# Altium PCB SD_Board.PcbDoc
Units mm, origin at the board's own origin, x right, y up, seen from the top; angles counter-clockwise.
Board outline 37.85 x 50.93 mm, 2 copper layers (Top Layer, Bottom Layer); 52 components, 41 nets, 216 pads, 226 vias.
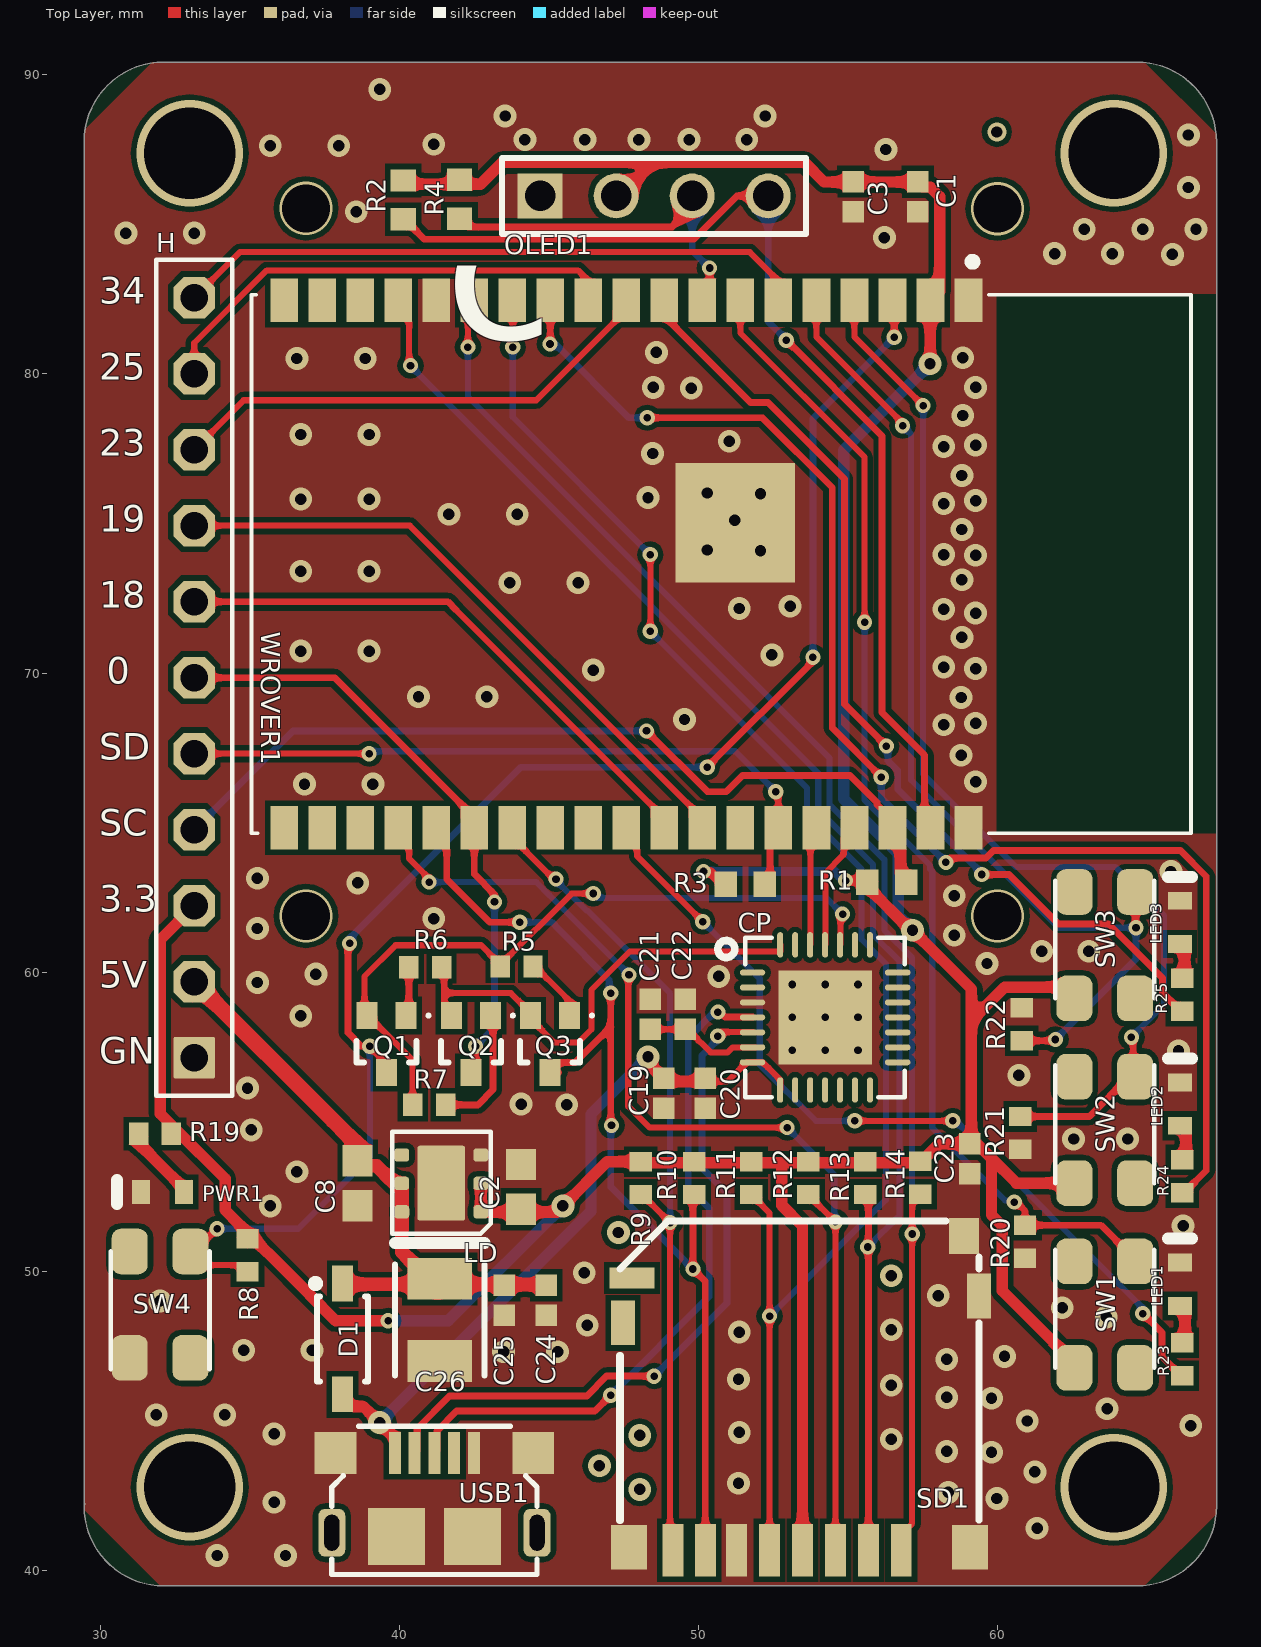
[diagram p0: Top Layer view]
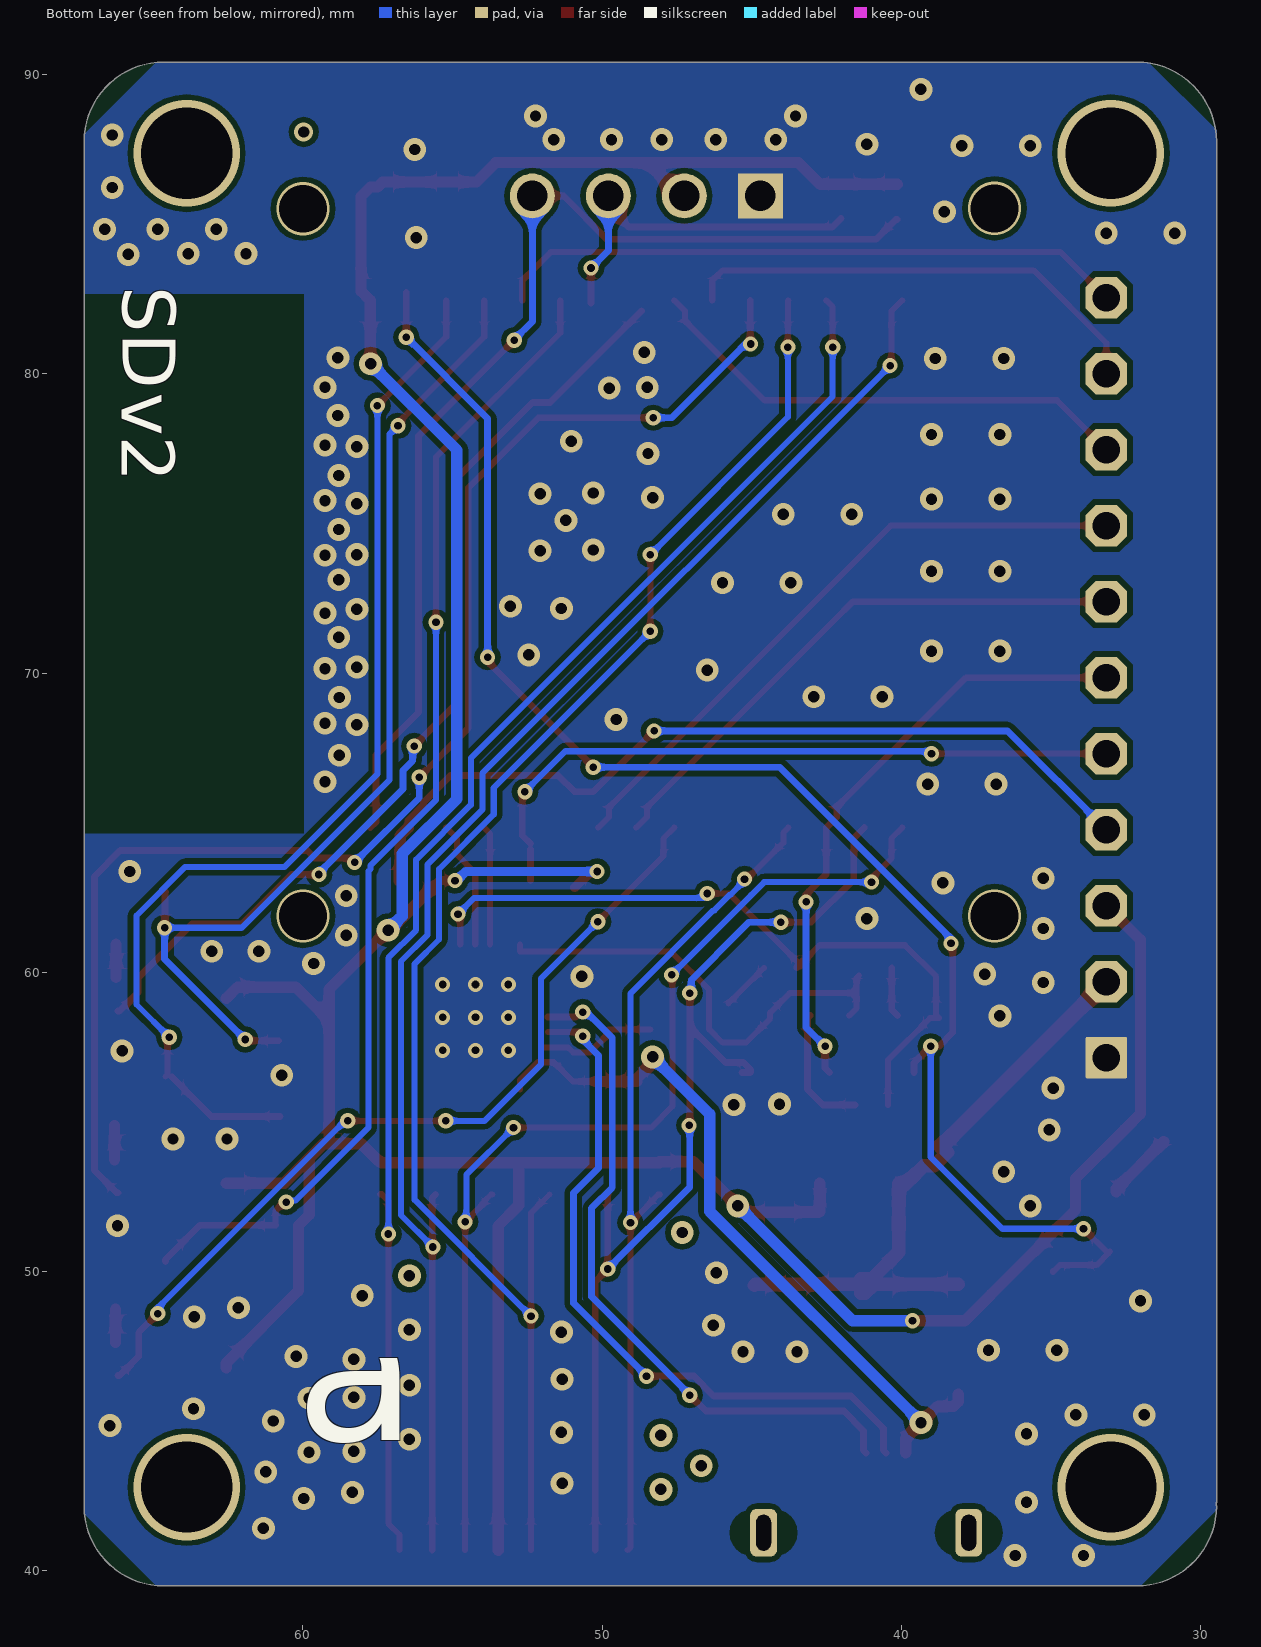
[diagram p1: Bottom Layer view, seen from below]

## Layer stack, top to bottom
Top Solder: solder mask 0.0102, Solder Resist, Dk 3.5
Top Layer: signal copper 0.0356
Dielectric 1: dielectric 0.32, FR-4, Dk 4.8
Bottom Layer: signal copper 0.0356
Bottom Solder: solder mask 0.0102, Solder Resist, Dk 3.5

## Board outline
29.464,42.164 cw(c29.591,42.164) 29.481,42.227 cw(c29.591,42.291) 29.464,42.291 29.464,87.757 cw(c29.591,87.757) 29.464,87.758 cw(c32.131,87.757) 32.131,90.424 cw(c32.131,90.297) 32.132,90.424 64.643,90.424 cw(c64.643,87.757) 67.31,87.757 67.31,87.376 cw(c67.183,87.376) 67.31,87.375 67.31,42.164 cw(c64.643,42.164) 64.643,39.497 32.132,39.497 32.131,39.497 cw(c32.131,42.164)

## Design rules (kind name [scope] priority, off if disabled: settings)
Clearance [All] p1: gap=0.178 ignorepadtopadclearanceinfootprint=FALSE
ComponentClearance [InComponent('No Component')] p1: gap=0 collisioncheckmode=3 verticalgap=2540 showdistances=FALSE
HoleSize [All] p1: absolutevalues=TRUE maxlimit=7.62 minlimit=0.025 maxpercent=80.000 minpercent=20.000
MinimumSolderMaskSliver [All] p1: minsoldermaskwidth=0
PolygonConnect PolygonConnect_2 [All vs IsNamedPolygon('BOT_GND')] p1: connectstyle=Direct reliefconductorwidth=0.254 reliefentries=4 polygonreliefangle="90 Angle" airgapwidth=0.254
PolygonConnect PolygonConnect_1 [All vs IsNamedPolygon('TOP_GND')] p2: connectstyle=Direct reliefconductorwidth=0.254 reliefentries=4 polygonreliefangle="90 Angle" airgapwidth=0.254
PolygonConnect [All] p3: connectstyle=Relief reliefconductorwidth=0.254 reliefentries=4 polygonreliefangle="90 Angle" airgapwidth=0.254
RoutingVias [All] p1: holewidth=0.254 width=0.508 viastyle="Through Hole" minholewidth=0.254 minwidth=0.508 maxholewidth=7.62 maxwidth=7.62
SilkToSilkClearance [All] p1: silktosilkclearance=0
SilkToSolderMaskClearance [IsPad] p1: minsilkscreentomaskgap=0 clearancetoexposedcopper=TRUE
SolderMaskExpansion [All] p1: expansion=0.102 istentingtop=FALSE
Width [All] p1: maxlimit=5.08 minlimit=0.178 preferedwidth=0.229
25 further rules are at their usual default settings.

## Components (designator, comment, footprint, x,y, rotation, side; value= is the part's Value field where it differs from the comment)
C1 "10uF" CAPC0402(1005)60_M 57.328,85.918 r270 top value=6.9pF
C2 "10uF" CAPC1608X90X35NL15T15 44.069,52.832 r270 top
C3 "1uF" CAPC0402(1005)60_M 55.169,85.926 r270 top value=6.9pF
C8 "10uF" CAPC1608X90X35NL15T15 38.608,52.959 r270 top
C19 "10uF" CAPC0402(1005)60_M 48.832,55.958 r270 top value=6.9pF
C20 "0.1uF" CAPC0402(1005)60_M 50.229,55.958 r270 top value=6.9pF
C21 "1uF" CAPC0402(1005)60_M 48.387,58.598 r270 top value=6.9pF
C22 "0.1uF" CAPC0402(1005)60_M 49.555,58.598 r270 top value=6.9pF
C23 "0.1uF" CAPC0402(1005)60_M 59.063,53.772 r270 top value=6.9pF
C24 "1uF" CAPC0402(1005)60_M 44.907,49.047 r270 top value=6.9pF
C25 "10uF" CAPC0402(1005)60_M 43.51,49.047 r270 top value=6.9pF
C26 "T491B105K025AT" KEMT-T491-B_L 41.351,48.387 r270 top
CP "CP" PCBComponent_1#1 54.229,58.496 r0 top
D1 "1N5819HW-7-F" DIOD-SOD-123-2_V 38.1,47.752 r90 top
H "H1X11" H1X11 32.385,56.134 r0 top
LD "LD39200" PCBComponent_1#2 43.232,51.619 r90 top
LED1 "grn" VISH-TLMX1100_V 66.091,49.581 r90 top
LED2 "grn" VISH-TLMX1100_V 66.091,55.601 r90 top
LED3 "grn" VISH-TLMX1100_V 66.091,61.671 r90 top
OLED1 "PH2541-4-SPGRH-6-3" PCE-PH2541-4-SPGRH-6-3_V 44.707,85.95 r90 top
PWR1 "grn" VISH-TLMX1100_V 32.084,52.667 r180 top
Q1 "MMBT2222AWT1G" ONSC-SC-70-3-419-04_V 39.573,57.607 r270 top
Q2 "MMBT2222AWT1G" ONSC-SC-70-3-419-04_V 42.393,57.607 r270 top
Q3 "MMBT2222AWT1G" ONSC-SC-70-3-419-04_V 45.034,57.607 r270 top
R1 "4.7k" RESC1608X55X30LL15T15 56.286,63.017 r180 top
R2 "4.7k" RESC1608X55X30LL15T15 40.132,85.816 r90 top
R3 "4.7k" RESC1608X55X30LL15T15 51.562,62.941 r180 top
R4 "4.7k" RESC1608X55X30LL15T15 42.012,85.841 r90 top
R5 "10K" RESC0402(1005)_M 43.917,60.198 r180 top value="10700.00 Ohm"
R6 "10K" RESC0402(1005)_M 40.869,60.173 r0 top value="10700.00 Ohm"
R7 "10K" RESC0402(1005)_M 40.996,55.575 r180 top value="10700.00 Ohm"
R8 "10K" RESC0402(1005)_M 34.925,50.546 r270 top value="10700.00 Ohm"
R9 "10K" RESC0402(1005)_M 48.072,53.128 r90 top value="10700.00 Ohm"
R10 "10K" RESC0402(1005)_M 49.85,53.128 r90 top value="10700.00 Ohm"
R11 "10K" RESC0402(1005)_M 51.755,53.128 r90 top value="10700.00 Ohm"
R12 "10K" RESC0402(1005)_M 53.66,53.128 r90 top value="10700.00 Ohm"
R13 "10K" RESC0402(1005)_M 55.565,53.128 r90 top value="10700.00 Ohm"
R14 "10K" RESC0402(1005)_M 57.412,53.137 r90 top value="10700.00 Ohm"
R19 "560" RESC0402(1005)_M 31.835,54.61 r180 top value="220.00 Ohm"
R20 "10K" RESC0402(1005)_M 60.909,51.003 r90 top value="10700.00 Ohm"
R21 "10K" RESC0402(1005)_M 60.757,54.635 r90 top value="10700.00 Ohm"
R22 "10K" RESC0402(1005)_M 60.808,58.268 r270 top value="10700.00 Ohm"
R23 "1K" RESC0402(1005)_M 66.171,47.075 r90 top value="10700.00 Ohm"
R24 "1K" RESC0402(1005)_M 66.171,53.188 r90 top value="10700.00 Ohm"
R25 "1K" RESC0402(1005)_M 66.171,59.258 r90 top value="10700.00 Ohm"
SD1 "Component_1" SD_Amphenol 46.475,39.891 r0 top
SW1 "SW4.2x3.2" Switch4.2x3.2 65.481,51.105 r180 top
SW2 "SW4.2x3.2" Switch4.2x3.2 65.481,57.277 r180 top
SW3 "SW4.2x3.2" Switch4.2x3.2 65.481,63.449 r180 top
SW4 "SW4.2x3.2" Switch4.2x3.2 30.099,46.355 r0 top
USB1 "1" PCBComponent_1#3 36.474,42.037 r0 top
WROVER1 "ESP32-WROVER-I" XCVR_ESP32-WROVER-I 50.756,73.649 r270 top

## Footprints (in the part's own frame and the unit in brackets; to place one, negate y for a bottom-side part, rotate by r counter-clockwise, add the part's x,y. Pads: shape width x height; smd on the part's side, far side on the other; paste and mask are expansions set on the pad)
CAPC0402(1005)60_M [mm] "Chip Capacitor, Body 1.0x0.5mm, Height 0.6mm, IPC Low Density"
  rect 0.72x0.72 smd: 1(-0.5,0) 2(0.5,0)
  body extent -0.55,-0.3 0.55,0.3, height 0.6
CAPC1608X90X35NL15T15 [mm] "Chip Capacitor, 2-Leads, Body 1.60x0.81mm, IPC Medium Density"
  rect 1.05x1 smd: 1(-0.75,0) 2(0.75,0)
  body extent -0.88,-0.48 0.87,0.48, height 0.9
DIOD-SOD-123-2_V [mm] "SOD-123, 2-Leads, Body 2.85x1.7mm (max), Pitch 3.7mm"
  rect 1.2x0.7 smd: 1(-1.85,0) 2(1.85,0)
  silkscreen extent -1.43,-0.85 1.97,1.02, body extent -1.42,-0.85 1.43,0.85, height 1.45
H1X11 [mil]
  rrect10% 55x55 hole 36: 1(30,40)
  oct 55x55 hole 36: 2(30,140) 3(30,240) 4(30,340) 5(30,440) 6(30,540) 7(30,640) 8(30,740) 9(30,840) 10(30,940) 11(30,1040)
  silkscreen extent -20,-10 80,1090
KEMT-T491-B_L [mm] "Molded Capacitor, 2-Leads, Body 3.70x3.00mm, IPC High Density"
  rect 1.4x2.15 smd: 1(-1.375,0) 2(1.375,0)
  silkscreen extent -2.57,-1.5 1.85,1.5, body extent -2.07,-1.5 2.07,1.5, height 2.1
ONSC-SC-70-3-419-04_V [mm] "SOT23, 3-Leads, Body 2x1.25mm, Pitch 0.65mm"
  rect 0.9x0.7 smd: 1(-0.95,0.65) 2(-0.95,-0.65) 3(0.95,0)
  silkscreen extent -1,-1 0.63,1.45, body extent -0.63,-1 0.63,1, height 1
PCBComponent_1#1 [mm]
  oval 0.85x0.2 smd: 1(-2.425,1.5) 2(-2.425,1) 3(-2.425,0.5) 4(-2.425,0) 5(-2.425,-0.5) 6(-2.425,-1) 7(-2.425,-1.5) 15(2.425,-1.5) 16(2.425,-1) 17(2.425,-0.5) 18(2.425,0) 19(2.425,0.5) 20(2.425,1) 21(2.425,1.5)
  oval 0.2x0.85 smd: 8(-1.5,-2.425) 9(-1,-2.425) 10(-0.5,-2.425) 11(0,-2.425) 12(0.5,-2.425) 13(1,-2.425) 14(1.5,-2.425) 22(1.5,2.425) 23(1,2.425) 24(0.5,2.425) 25(0,2.425) 26(-0.5,2.425) 27(-1,2.425) 28(-1.5,2.425)
  rect 3.13x3.13 smd: 29(0,0)
  silkscreen extent -3.58,-2.67 2.67,2.67
PCBComponent_1#2 [mm]
  rrect50% 0.45x0.5 smd: 1(0.381,0.508) 2(1.33,0.51) 3(2.28,0.51) 4(2.279,3.152) 5(1.329,3.152) 6(0.38,3.15)
  rrect10% 2.5x1.6 smd: 7(1.34,1.83)
  silkscreen extent -0.35,0.18 3.05,3.47
PCBComponent_1#3 [mm]
  rect 0.4x1.4 smd: 1(3.378,1.905) 2(4.039,1.905) 3(4.699,1.905) 4(5.359,1.905) 5(6.02,1.905)
  rect 1.4x1.4 smd: 6(1.397,1.905) 7(8.001,1.905)
  rect 1.9x1.9 smd: 8(3.429,-0.889) 9(5.969,-0.889)
  rrect50% 0.9x1.6 hole 1.2 slot 0.5 at 0 deg: 10(1.27,-0.762) 11(8.128,-0.762)
  silkscreen extent 1.27,-2.16 8.13,2.79
PCE-PH2541-4-SPGRH-6-3_V [mm] "Male Header, Pitch 2.54mm, 1x4 Position, Mated Height 6mm, Tail Length 3mm"
  rect 1.5x1.5 hole 1.02: 1(0,0)
  round 1.5 hole 1.02: 2(0,-2.54) 3(0,-5.08) 4(0,-7.62)
  silkscreen extent -1.27,-8.89 1.27,1.27, body extent -1.27,-8.89 1.27,1.27, height 8.54
RESC0402(1005)_M [mm] "Chip Resistor, Body 1.0x0.5mm, IPC Low Density"
  rect 0.65x0.75 smd: 1(-0.55,0) 2(0.55,0)
  body extent -0.52,-0.28 0.53,0.28, height 0.4
RESC1608X55X30LL15T15 [mm] "Chip Resistor, 2-Leads, Body 1.75x0.95mm, IPC High Density"
  rect 0.75x0.85 smd: 1(-0.65,0) 2(0.65,0)
  body extent -0.87,-0.48 0.87,0.48, height 0.55
SD_Amphenol [mm]
  rect 0.7x1.75 smd: 1(10.3,0.8) 2(9.2,0.8) 3(8.1,0.8) 4(7,0.8) 5(5.9,0.8) 6(4.8,0.8) 7(3.75,0.8) 8(2.667,0.8)
  rect 0.8x1.5 smd: 9(12.9,9.3) 13(1,8.4)
  rect 1x1.2 smd: 10(12.4,11.3)
  rect 1.2x1.5 smd: 11(12.6,0.9) 12(1.2,0.9)
  rect 1.5x0.7 smd: 14(1.3,9.9)
  silkscreen extent 0.9,1.8 12.9,11.8
Switch4.2x3.2 [mil]
  rrect50% 47.24x60 smd: 1(35,30) 2(115,170) 3(115,30) 4(35,170)
  silkscreen extent 10,15 140,170
VISH-TLMX1100_V [mm] "SMD, 2-Leads, Body 1.6x0.8mm"
  rect 0.6x0.8 smd: 1(-0.725,0) 2(0.725,0)
  silkscreen extent 1.53,-0.4 1.53,0.4, body extent -0.8,-0.4 0.8,0.4, height 0.65
XCVR_ESP32-WROVER-I [mm]
  rect 1.45x0.93 smd: 1(-8.81,8.26) 2(-8.81,6.99) 3(-8.81,5.72) 4(-8.81,4.45) 5(-8.81,3.18) 6(-8.81,1.91) 7(-8.81,0.64) 8(-8.81,-0.63) 9(-8.81,-1.9) 10(-8.81,-3.17) 11(-8.81,-4.44) 12(-8.81,-5.71) 13(-8.81,-6.98) 14(-8.81,-8.25) 15(-8.81,-9.52) 16(-8.81,-10.79) 17(-8.81,-12.06) 18(-8.81,-13.33) 19(-8.81,-14.6) 20(8.81,-14.6) 21(8.81,-13.33) 22(8.81,-12.06) 23(8.81,-10.79) 24(8.81,-9.52) 25(8.81,-8.25) 26(8.81,-6.98) 27(8.81,-5.71) 28(8.81,-4.44) 29(8.81,-3.17) 30(8.81,-1.9) 31(8.81,-0.63) 32(8.81,0.64) 33(8.81,1.91) 34(8.81,3.18) 35(8.81,4.45) 36(8.81,5.72) 37(8.81,6.99) 38(8.81,8.26)
  rect 4x4 smd: 39(-1.38,0.47)
  silkscreen extent -10.21,-15.7 9,15.7

## Part data
C1 C3 C19 C21 C24 C25: library part CMP-1034-00526-1, "CAP 10uF 6.3V ±0.5pF 0402 (1005 Metric) Thickness 0.6mm SMD", Case-EIA=0402, Case-Metric=1005, Rated Voltage="50 V", Tolerance=Â±0.5pF, Max Thickness="0.6 mm", Technology=SMT
C2 C8: library part CMP-2006-04419-1, Manufacturer="AVX Interconnect / Elco", Part Number=06035C271JAT2A
C20 C22 C23: library part CMP-1034-00526-1, "CAP .1uF 6.3V ±0.5pF 0402 (1005 Metric) Thickness 0.6mm SMD", Case-EIA=0402, Case-Metric=1005, Rated Voltage="50 V", Tolerance=Â±0.5pF, Max Thickness="0.6 mm", Technology=SMT
C26: library part CMP-2000-07190-1, "Tantalum Capacitor, 1 uF, +/- 10%, 25 V, -55 to 125 degC, 1411 (3528 Metric), RoHS, Tape and Reel", Capacitance=1uF, Case Code=B, Case Style=Molded, Manufacturer=Kemet, Operating Temp Range=-55Cto125C, Package / Case=3528-21, Package Description="2-Pin Surface Mount Device, Body 3.5 x 2.8 mm", Package Reference=T491-B, Tolerance (+ or -)=10%, Voltage=25VDC, Construction=SMTChip, Datasheet URL=http://capacitoredge.kemet.com/capedge2/DataSheet/Datasheet-T491B105K025AT.pdf?pn=T491B105K025AT, Datasheet Version=10/2016, DCL=0.5uA, DF=4%, ESR=5ohm, Failure Rate=NotRequired, Insulation=NotRequired, Lead Spacing (nom)=NotRequiredmm, Length W/Weld=NotRequiredmm, Manufacturer URL=http://www.kemet.com/, Mounting Style=SurfaceMount, Mounting Technology=SurfaceMount, Packaging=TapeandReel, Polarity=Polar, Product Depth (mm)=2.8mm, Product Diameter (mm)=NotRequiredmm, Product Height (mm)=1.9mm, Product Length (mm)=3.5mm, Seal=NotRequired, Seated Plane Height=NotRequiredmm, Wire Form=NotRequired
D1: library part CMP-0303-00003-1, "1.0 A Surface Mount Schottky Barrier Rectifier, 40 V, -65 to 125 degC, 2-Pin SOD-123 Package, RoHS, Tape and Reel", @ Terminal Temperature TT (degC)=90, Forward Voltage Drop VF (V)=0.45, Manufacturer="Diodes Inc", Maximum Average Rectified Current IO (A)=1, Maximum Reverse Current IR (uA)=50, Operating and Storage Temperature Range="-65 to 125 degC", Peak Forward Surge Current IFSM (A)=25, Peak Repetitive Reverse Voltage VRRM (V)=40, @ IF (A)=1, @ VR (V)=40, ComponentLink1Description="Manufacturer URL", ComponentLink1URL=http://www.diodes.com/, ComponentLink2Description=Datasheet, ComponentLink2URL=http://www.diodes.com/datasheets/ds30217.pdf, DatasheetVersion="Rev. 15-2", Mounting Technology="Surface Mount", PackageDescription="2-Pin SOD-123, Body 2.7 x 1.55 mm, Pitch 3.7 mm", PackageReference=SOD-123-2, Packing="Tape and Reel", PartNumber=1N5819HW-7-F, RoHS=TRUE, Total Capacitance CT (pF)=50, VR (RMS) (V)=28
LED1 LED2 LED3 PWR1: library part CMP-1666-00027-1, "LED, RED, 2.1 V, -40 to 100 degC, 2-Pin SMD (0603), RoHS, Tape and Reel", Capacitance="12 pF", Case/Package=0603, Case Code (Metric)=1608, Max Operating Temperature=125degC, Min Operating Temperature=-55degC, Package Quantity=4000, Resistance="100000000000 Ohm", Tolerance=5%, Type (Capacitors)=C0G, Voltage Rating="50 V", Case Code (Imperial)=0603, ComponentLink1Description="Manufacturer URL", ComponentLink1URL=http://www.vishay.com/, ComponentLink2Description=Datasheet, ComponentLink2URL=http://www.vishay.com/docs/83173/tlmb1100.pdf, DatasheetVersion="Rev. 2.7, 03/2016", HEIGHT="0.8 mm", Length="1.6 mm", Mount="Surface Mount", PackageDescription="2-Pin Surface Mount Device, Body 1.6 x 0.8 mm", PackageReference=TLMX1100, Packaging="Tape and Reel", Pins=2, Radiation Hardening=No, REACH SVHC="No SVHC", RoHSCompliant=True, Voltage Rating (DC)="50 V", Width="0.8 mm"
OLED1: library part CMP-0423-00005-2, "Male Header, Pitch 2.54 mm, 1x4 Position, Mated Height 6 mm, Tail Length 3 mm", Contact Resistance (Max)="20 Megohms", Current Rating="3 Amps", Dielectric Withstaanding="600 AC/DC", Insulator resistance (Min.)="1000 Megohms", Manufacturer="Pinchao Electronic", Operating Temperature="-40 to 105 degC", ComponentLink1Description="Manufacturer URL", ComponentLink1URL=http://www.suzhoupinchao.com/, Connector Type="Male Header", Contact Meaterial=Brass, Insulator Material=PBT, Mounting Technology="Through Hole", No. of positions=4, No. of Rows=1, PackageDescription="Male Header, Pitch 2.54 mm, 1x4 Position, Mated Height 6 mm, Tail Length 3 mm", PackageReference=PH2541-4-SPGRH-6-3, PartNumber=PH2541-4-SPGRH-6-3, Pitch="2.54 mm"
Q1 Q2 Q3: library part CMP-1048-00382-1, "General Purpose Transistor, NPN Silicon, 3-Pin SC70, Pb-Free, Tape and Reel", Manufacturer="On Semiconductor", ComponentLink1Description="Manufacturer URL", ComponentLink1URL=http://www.onsemi.com/, ComponentLink2Description=Datasheet, ComponentLink2URL=http://www.onsemi.cn/pub_link/Collateral/MMBT2222AWT1-D.PDF, ComponentLink3Description="Package Specification", ComponentLink3URL=http://www.onsemi.cn/pub_link/Collateral/419-04.PDF, DatasheetVersion="Rev. 6", fT Min (MHz)=300, IC Continuous (A)=0.6, Mounting Technology="Surface Mount", PackageDescription="3-Pin Small Outline Transistor, Body 2 x 1.25 mm, Pitch 0.65 mm", PackageReference=SC-70-3-419-04, PackageVersion="Rev. N, 11/2008", Packing="Tape and Reel", PartNumber=MMBT2222AWT1G, Polarity=NPN, RoHS=TRUE
R1 R2 R3 R4: library part CMP-1665-00048-1, "Chip Resistor, 22 Ohm, +/- 1%, 0.1 W, -55 to 155 degC, 0603 (1608 Metric), RoHS, Tape and Reel", ComponentLink1Description="Manufacturer URL", ComponentLink1URL=http://www.panasonic.com/, ComponentLink2Description=Datasheet, ComponentLink2URL=http://industrial.panasonic.com/cdbs/www-data/pdf/RDA0000/AOA0000C86.pdf, DatasheetVersion=Apr-15, PackageDescription="2-Pin Surface Mount Device, Body 1.6 x 0.85 mm", PackageReference=0603
R5 R6 R7 R8 R9 R10 R11 R12 R13 R14 R20 R21 R22 R23 R24 R25: library part CMP-1011-00626-1, "10K 0.063W 1% 0402 (1005 Metric)  SMD", Case-EIA=0402, Case-Metric=1005, Power="0.063 W", Tolerance="1 %", Technology=SMT
R19: library part CMP-1011-00433-1, "560R 0.063W 1% 0402 (1005 Metric)  SMD", Case-EIA=0402, Case-Metric=1005, Power="0.063 W", Tolerance="1 %", Technology=SMT
USB1: library part Component_1
WROVER1: "Module: combo; GPIO, I2C x2, I2S x2, SDIO, SPI x3, UART x3; U.FL", Package="Module Espressif Systems", Digi-Key_Part_Number=1904-1008-1-ND, Digi-Key_Purchase_URL=https://www.digikey.com/product-detail/en/espressif-systems/ESP32-WROVER-I/1904-1008-1-ND/8544303?utm_source=snapeda&utm_medium=aggregator&utm_campaign=symbol, MF="Espressif Systems", MP=ESP32-WROVER-I, SnapEDA_Link=https://www.snapeda.com/parts/ESP32-WROVER-I/Espressif%20Systems/view-part/?ref=snap

## Via types
v1: diameter 0.762, hole 0.381, Top Layer to Bottom Layer, tented both sides, 151 vias
v2: diameter 0.508, hole 0.254, Top Layer to Bottom Layer, tented both sides, 57 vias
v3: diameter 0.5, hole 0.254, Top Layer to Bottom Layer, 9 vias
v4: diameter 3.556, hole 3.048, Top Layer to Bottom Layer, 4 vias
v5: diameter 1.778, hole 1.6, Top Layer to Bottom Layer, 4 vias
v6: diameter 0.635, hole 0.381, Top Layer to Bottom Layer, tented bottom, 1 vias

## Nets (pads, with @x,y where several pads share a name; then routed paths per layer and width w, separated by ;. In a path a pad name is that pad's centre, name@x,y a point inside that pad or via, vN(x,y) a via of type N, cw(c..) or ccw(c..) an arc to the next point about the centre after c; other vN are vias at no path point)
3.3v: C1.1 C2.2 C3.1 C23.1 H.3 LD.1 LD.2 OLED1.2 R1.2 R2.2 R3.2 R4.2 R8.1 R9.2 R10.2 R11.2 R12.2 R13.2 R14.2 R19.1 SD1.4 SW1.2 SW2.2 SW3.2 WROVER1.2 | length 137.7
  Top Layer w0.305: v2(50.165,63.373) 50.379,63.373 R3.2@50.912,62.84 ; v2(54.915,63.068) 55.434,63.068 R1.2@55.612,62.89
  Top Layer w0.381: H.3 32.004,61.087 32.004,55.281 32.53,54.755 34.176,53.109 34.176,52.062 36.988,49.249 36.988,49.243 37.87,48.362 v2(39.624,48.362) ; R2.2@40.132,86.34 42.714,86.34 43.442,87.068 48.494,87.068 ; LD.2 LD.2 42.723,52.001 LD.1 ; LD.1@42.724,52.025 42.758,51.991 45.26,51.991 v1(45.466,52.197) 46.947,53.678 R9.2 ; OLED1.2 47.376,85.95 48.494,87.068 ; R9.2@48.072,53.646 52.781,53.646 ; SD1.4 53.475,51.522 52.781,52.216 52.781,53.646 ; R1.2@55.612,62.89 57.091,61.411 v1(57.15,61.411) 59.118,59.442 59.118,58.395 ; v1(57.734,80.34) 57.74,80.346 57.74,82.453 WROVER1.2 58.056,82.769 58.056,85.93 57.738,86.248 57.497,86.248 C1.1 54.197,86.418 53.546,87.068 48.494,87.068 ; SW1.2 62.56,46.949 60.143,49.366 60.143,51.543 59.791,51.895 59.791,53.789 ; SW2.2 60.621,52.959 59.791,53.789 ; SW3.2 62.181,59.511 60.235,59.511 59.118,58.395 ; 52.781,53.646 57.37,53.646 R14.2 57.462,53.687 58.047,54.272 C23.1 ; C23.1 59.118,54.327 59.118,58.395 ; C23.1 59.308,54.272 59.791,53.789
  Bottom Layer w0.305: v2(50.165,63.373) 54.555,63.373 54.86,63.068 v2(54.915,63.068)
  Bottom Layer w0.381: v2(39.624,48.362) 41.631,48.362 v1(45.466,52.197) ; v1(57.15,61.411) 56.68,61.881 56.68,63.966 54.851,65.795 54.851,77.457 v1(57.734,80.34)
5V: C8.1 C24.1 C25.1 C26.1 D1.2 H.2 LD.5 LD.6 | length 20.7
  Top Layer w0.457: D1.2@38.1,49.575 40.913,49.575 41.201,49.287 C26.1@41.351,49.287 ; C8.1@38.652,54.185 38.456,53.989 38.905,53.54 39.242,53.54 39.834,52.948 LD.5 LD.6 ; LD.6 40.082,50.656 40.976,49.762 C26.1 ; C26.1@41.351,49.575 44.88,49.575 C24.1
  Top Layer w0.533: H.2@33.343,59.494 37.782,55.054 38.274,54.563 C8.1@38.652,54.185
CLK: R11.1 SD1.5 WROVER1.13 | length 52.9
  Top Layer w0.203: WROVER1.13 43.79,82.446 v2(43.79,80.899) ; v2(48.387,71.399) v2(48.387,73.965) ; R11.1 52.375,51.958 v2(52.375,48.514) SD1.5
  Bottom Layer w0.203: v2(43.79,80.899) 43.79,78.562 v2(48.387,73.965) ; v2(48.387,71.399) 53.619,66.167 53.619,65.284 55.448,63.455 55.448,61.101 56.261,60.288 56.261,52.4 v2(52.375,48.514)
CMD: R12.1 SD1.3 WROVER1.23 | length 36.3
  Top Layer w0.203: WROVER1.23 40.33,64.476 40.33,63.802 40.996,63.136 v2(40.996,63.017) ; v2(47.676,59.919) 47.65,59.893 47.65,55.524 48.361,54.813 v2(52.959,54.813) ; R12.1 53.71,52.578 53.933,52.354 53.933,52.304 v2(54.575,51.663) SD1.3
  Bottom Layer w0.203: v2(40.996,63.017) 44.585,63.017 45.016,62.586 45.018,62.586 47.676,59.928 v2(47.676,59.919) ; v2(52.959,54.813) 54.534,53.238 54.534,51.704 v2(54.575,51.663)
D+_P: CP.4 USB1.3 | length 23.1
  Top Layer w0.229: USB1.3 41.259,44.028 41.259,44.68 41.918,45.339 46.533,45.339 v2(47.066,45.872) ; v2(50.648,58.674) 50.723,58.674 50.888,58.51 CP.4@51.812,58.51
  Bottom Layer w0.229: v2(47.066,45.872) 50.355,49.162 50.355,52.121 49.657,52.819 49.657,57.81 v2@50.521,58.674
D-_N: CP.5 USB1.2 | length 23.7
  Top Layer w0.203: v2(50.642,57.873) 50.777,58.008 51.81,58.008 CP.5@51.812,58.01
  Top Layer w0.229: USB1.2 40.599,44.028 40.599,44.764 41.681,45.847 46.269,45.847 46.929,46.507 v2(48.514,46.507)
  Bottom Layer w0.229: v2(48.514,46.507) 50.952,48.946 50.952,52.629 50.114,53.467 50.114,57.226 v2@50.749,57.861
DAT0: Q3.3 R10.1 SD1.7 WROVER1.24 | length 34.5
  Top Layer w0.229: WROVER1.24 41.587,64.489 41.587,63.112 43.021,61.678 v2(44.022,61.678) ; Q3.3@45.324,56.657 Q3.3 45.034,56.757 45.27,56.993 45.872,56.993 47.063,58.184 ; v2@47.063,59.309 47.063,58.184 ; v2(47.092,54.889) 47.063,54.918 47.063,58.184 ; R10.1@49.8,52.578 49.809,52.587 v2(49.809,50.089) 50.225,49.673 SD1.7
  Bottom Layer w0.229: v2(44.022,61.678) 45.095,61.678 45.348,61.426 45.348,61.419 47.013,59.754 47.013,59.362 v2(47.066,59.309) ; v2@47.066,54.788 47.066,52.832 v2(49.809,50.089)
DAT1: R9.1 SD1.8 WROVER1.26 | length 27.9
  Top Layer w0.203: WROVER1.26 43.942,64.673 43.942,64.335 45.158,63.119 v2(45.237,63.119) ; R9.1 48.122,52.578 48.345,52.354 48.345,52.34 v2(49.047,51.638) ; v2@49.047,51.721 v2(49.047,51.638) ; SD1.8 49.047,40.785 v2(49.047,51.638)
  Bottom Layer w0.203: v2(45.237,63.119) 45.237,63.063 45.689,62.611 45.71,62.611 46.25,62.071 46.278,62.071 49.047,59.301 v2(49.047,51.638)
DAT2: R14.1 SD1.1 WROVER1.14 | length 49.6
  Top Layer w0.203: v2(42.291,80.899) 42.291,82.244 WROVER1.14 ; SD1.1 56.775,41.216 57.138,41.579 v2(57.138,51.257) 57.138,52.363 57.362,52.587 R14.1
  Bottom Layer w0.203: v2(42.291,80.899) 42.291,79.248 54.381,67.158 54.381,65.6 56.21,63.771 56.21,61.417 57.138,60.488 v2(57.138,51.257)
DAT3: R13.1 SD1.2 WROVER1.16 | length 50.9
  Top Layer w0.203: WROVER1.16 40.33,82.096 40.33,80.32 v2(40.372,80.278)
  Top Layer w0.229: R13.1 55.675,52.468 SD1.2
  Bottom Layer w0.203: v2(40.372,80.278) 54,66.65 54,65.442 55.829,63.613 55.829,61.259 56.718,60.37 56.718,51.892 v2(55.651,50.825)
DTR: CP.28 Q2.2 Q3.2 R6.2 | length 15.8
  Top Layer w0.203: R6.2@41.419,59.893 41.494,59.818 41.494,59.312 ; Q2.2 41.494,58.806 41.494,59.312 ; CP.28@52.737,60.935 52.737,60.701 52.735,60.699 47.702,60.699 46.422,59.419 46.422,58.099 45.98,57.658 45.183,57.658 44.384,58.457 Q3.2 44.384,58.657 43.73,59.312 41.494,59.312
GND: C1.2 C2.1 C3.2 C8.2 C19.2 C20.2 C21.1 C22.1 C23.2 C24.2 C25.2 C26.2 CP.3 CP.29 H.1 LD.3 LD.7 LED1.2 LED2.2 LED3.2 OLED1.1 PWR1.2 R20.1 R21.1 R22.1 SD1.6 SD1.9 SD1.10 SD1.11 SD1.12 SW4.1 USB1.5 USB1.6 USB1.7 USB1.8 USB1.9 WROVER1.1 WROVER1.15 WROVER1.38 WROVER1.39
  other v1: 33.909,40.513 36.195,40.513 61.316,41.427 35.814,42.291 59.969,42.418 58.344,42.621 51.333,42.926 61.239,43.307 59.792,43.967 58.293,43.993 56.439,44.399 35.814,44.577 51.359,44.628 66.446,44.856 60.985,45.009 31.877,45.212 34.163,45.212 63.652,45.415 59.792,45.771 58.293,45.796 56.439,46.203 51.333,46.406 58.293,47.066 60.223,47.168 43.485,47.32 45.288,47.32 34.798,47.371 37.084,47.371 51.359,47.981 56.439,48.057 46.279,48.209 63.627,48.489 62.154,48.793 32.004,49.022 58.014,49.2 46.177,49.962 66.192,51.537 35.687,52.197 36.576,53.34 62.535,54.432 64.338,54.432 35.052,54.737 45.593,55.575 44.069,55.601 34.925,56.134 60.706,56.566 66.04,57.379 36.703,58.547 35.255,59.665 50.673,59.868 37.211,59.944 59.639,60.3 61.468,60.706 63.043,60.706 58.547,61.239 35.255,61.468 41.148,61.798 58.547,62.56 38.608,62.992 35.255,63.144 65.786,63.373 36.83,66.294 39.116,66.294 59.258,66.37 58.776,67.259 58.191,68.275 59.258,68.326 49.53,68.453 58.776,69.19 40.64,69.215 42.926,69.215 46.482,70.104 59.258,70.155 58.191,70.206 52.451,70.612 36.703,70.739 38.989,70.739 58.801,71.196 59.258,72.009 58.191,72.136 51.359,72.161 53.061,72.238 43.688,73.025 45.974,73.025 58.801,73.127 36.703,73.406 38.989,73.406 59.258,73.939 58.191,73.965 52.07,74.092 50.292,74.117 58.801,74.803 51.206,75.108 41.656,75.311 43.942,75.311 58.191,75.667 59.258,75.768 36.703,75.819 38.989,75.819 48.311,75.87 52.07,75.997 50.292,76.022 58.801,76.606 48.463,77.343 58.191,77.572 59.258,77.622 51.029,77.749 36.703,77.978 38.989,77.978 58.826,78.613 49.759,79.527 48.489,79.553 59.258,79.553 36.576,80.518 38.862,80.518 58.826,80.543 48.59,80.721 65.837,83.998 61.9,84.023 63.83,84.023 56.21,84.557 30.861,84.709 33.147,84.709 62.89,84.836 64.846,84.836 66.624,84.836 38.557,85.42 66.37,86.233 56.261,87.503 35.687,87.63 37.973,87.63 41.148,87.681 44.196,87.833 46.203,87.833 48.006,87.833 49.682,87.833 51.613,87.833 66.37,87.986 43.536,88.621 52.222,88.621 39.345,89.51
  other v3: 53.129,57.396 54.229,57.396 55.329,57.396 53.129,58.496 54.229,58.496 55.329,58.496 53.129,59.596 54.229,59.596 55.329,59.596
I34: H.11 WROVER1.6 | length 21.2
  Top Layer w0.203: H.11 34.671,84.074 51.714,84.074 52.666,83.122 WROVER1.6
I35: R20.2 SW1.1 WROVER1.7 | length 39
  Top Layer w0.203: WROVER1.7 51.396,81.37 55.55,77.216 v2(55.55,71.704) ; v2@60.747,52.203 60.909,52.041 R20.2
  Top Layer w0.229: R20.2 63.443,51.553 64.592,50.404 SW1.1
  Bottom Layer w0.203: v2(55.55,71.704) 55.55,65.761 57.734,63.576 57.734,63.457 57.81,63.381 57.81,54.813 60.241,52.382 60.495,52.382 v2(60.554,52.324)
I36: R21.2 SW2.1 WROVER1.4 | length 36.9
  Top Layer w0.203: WROVER1.4 55.206,81.243 v2(57.506,78.943) ; v2(64.465,57.836) 64.524,57.777 64.524,56.584 SW2.1
  Top Layer w0.229: R21.2 63.059,55.185 SW2.1@64.389,56.515
  Bottom Layer w0.203: v2(57.506,78.943) 57.506,66.625 60.606,63.525 63.932,63.525 65.557,61.9 65.557,58.928 v2(64.465,57.836)
I39: R22.2 SW3.1 WROVER1.5 | length 34.1
  Top Layer w0.203: WROVER1.5 53.936,81.243 56.82,78.359 v2(56.82,78.27)
  Top Layer w0.229: R22.2 61.883,57.718 v2(61.925,57.76) ; SW3.1 64.605,62.674 64.605,61.506 v2(64.618,61.493)
  Bottom Layer w0.203: v2(56.82,78.27) 57.099,77.991 57.099,66.437 62.043,61.493 v2(64.618,61.493)
  Bottom Layer w0.229: v2(61.925,57.76) 64.618,60.452 v2(64.618,61.493)
IO0: H.6 Q2.3 WROVER1.25 | length 20.4
  Top Layer w0.229: H.6 37.828,69.85 42.155,65.523 42.155,65.19 WROVER1.25 42.506,63.285 43.18,62.611 v2(43.18,62.357) ; Q2.3 42.545,56.81 v2(42.545,57.531)
  Bottom Layer w0.229: v2(42.545,57.531) 43.18,58.166 v2(43.18,62.357)
IO5: R23.1 WROVER1.29 | length 28.8
  Top Layer w0.203: WROVER1.29 47.95,64.476 47.95,63.887 v2(50.14,61.697) ; v2(55.22,55.042) v2(58.496,55.042)
  Top Layer w0.229: v2(64.846,48.599) 65.484,47.961 65.484,47.161 66.121,46.525 R23.1
  Bottom Layer w0.203: v2(50.14,61.697) 52.045,59.792 52.045,56.921 53.924,55.042 v2(55.22,55.042) ; v2(58.496,55.042) 58.59,55.042 64.846,48.786 v2(64.846,48.599)
IO18: H.7 WROVER1.30 | length 19
  Top Layer w0.203: 41.892,72.118 48.493,65.518 48.493,65.203 WROVER1.30
  Top Layer w0.229: H.7 41.621,72.39 41.892,72.118
IO19: H.8 WROVER1.31 | length 21.3
  Top Layer w0.203: H.8 40.351,74.93 49.763,65.518 49.763,65.203 WROVER1.31
IO23: H.9 WROVER1.10 | length 16.7
  Top Layer w0.203: H.9 34.798,79.121 44.577,79.121 47.223,81.767 47.223,82.096 WROVER1.10
IO25: H.10 WROVER1.11 | length 16
  Top Layer w0.203: H.10 33.147,81.035 35.575,83.464 45.975,83.464 46.316,83.122 WROVER1.11
IO27: R24.1 WROVER1.12 | length 47.1
  Top Layer w0.229: v2@45.046,81.001 WROVER1.12 ; v2(48.285,78.537) 52.132,78.537 54.47,76.198 54.47,68.161 v2(56.109,66.523) ; v2(58.268,63.678) 58.412,63.822 59.602,63.822 59.851,64.072 66.103,64.072 66.967,63.208 66.967,53.384 66.221,52.638 R24.1
  Bottom Layer w0.229: v2(45.034,81.001) 45.212,81.001 47.676,78.537 v2(48.285,78.537) ; v2(56.109,66.523) 56.109,65.837 v2(58.268,63.678)
IO33: R25.1 WROVER1.9 | length 32.5
  Top Layer w0.229: WROVER1.9@48.676,82.109 51.74,79.045 52.324,79.045 54.877,76.492 54.877,68.965 v2(56.277,67.564) ; v2@59.461,63.269 60.379,63.269 62.025,61.623 63.7,61.623 65.504,59.819 65.504,59.325 66.121,58.708 R25.1
  Bottom Layer w0.229: v2(56.277,67.564) 56.331,67.511 56.331,67.073 56.655,66.749 56.655,66.129 59.461,63.322 v2(59.461,63.271)
NetC21_2: C21.2 C22.2 CP.6 | length 4
  Top Layer w0.203: C21.2 C22.2@49.632,58.098 ; C22.2 C22.2@49.784,58.098 ; C22.2@49.748,57.985 50.405,57.328 50.97,57.328 51.14,57.498 51.812,57.498 CP.6@51.919,57.498
NetLED1_1: LED1.1 R23.2 | length 1.1
  Top Layer w0.381: R23.2@66.259,47.634 LED1.1@66.259,48.745
NetLED2_1: LED2.1 R24.2 | length 1.1
  Top Layer w0.381: R24.2@66.294,53.738 LED2.1@66.294,54.876
NetLED3_1: LED3.1 R25.2 | length 1.1
  Top Layer w0.381: R25.2@66.243,59.834 LED3.1@66.243,60.946
NetPWR1_1: PWR1.1 R19.2 | length 2.3
  Top Layer w0.381: R19.2@31.227,54.348 32.809,52.767 PWR1.1
NetQ1_1: Q1.1 R6.1 | length 1.7
  Top Layer w0.229: Q1.1@40.122,58.557 40.319,58.754 R6.1@40.319,60.147
NetQ2_1: Q2.1 R7.1 | length 4.3
  Top Layer w0.229: R7.1 42.621,55.575 43.129,56.083 43.129,58.471 Q2.1
NetQ3_1: Q3.1 R5.1 | length 1.7
  Top Layer w0.203: R5.1@44.594,60.147 Q3.1@45.78,58.961
RESET: Q1.3 R8.2 SW4.2 WROVER1.3 | length 50.8
  Top Layer w0.203: SW4.2 SW4.2@33.084,50.609 ; v2(33.909,51.435) SW4.2@33.084,50.609 ; R8.2@34.925,50.013 R8.2 34.702,50.219 33.474,50.219 SW4.2@33.084,50.609
  Top Layer w0.229: v2(38.338,60.969) 38.281,60.912 38.281,57.986 38.736,57.531 v2(39.014,57.531) ; v2@39.084,57.461 39.573,56.972 Q1.3 ; v2(50.29,66.859) 53.823,70.392 v2(53.823,70.536) ; v2(56.54,81.229) WROVER1.3@56.54,82.728
  Bottom Layer w0.203: v2(33.909,51.435) 36.621,51.435 39.014,53.828 v2@39.014,57.302
  Bottom Layer w0.229: v2(38.338,60.969) 38.338,61.132 44.065,66.859 v2(50.29,66.859) ; v2(53.823,70.536) 53.823,78.511 v2(56.54,81.229)
RTS: CP.24 Q1.2 R5.2 R7.2 | length 24.4
  Top Layer w0.203: R7.2 40.446,57.065 39.04,58.471 38.735,58.471 38.837,58.572 38.837,59.868 39.878,60.909 42.732,60.909 43.22,60.421 43.27,60.421 R5.2@43.405,60.286 ; R5.2 43.367,60.248 R5.2@43.405,60.286 ; R5.2@43.43,60.261 43.494,60.197 R5.2@43.494,60.147 ; v2(46.482,62.636) 45.755,62.636 R5.2@43.405,60.286 ; CP.24@54.737,60.935 54.737,61.792 54.813,61.868 v2(54.813,61.951)
  Bottom Layer w0.203: v2(46.482,62.636) 46.634,62.484 54.28,62.484 v2(54.813,61.951)
RX0: CP.26 WROVER1.34 | length 4
  Top Layer w0.203: CP.26@53.737,60.935 53.737,64.64 WROVER1.34
SCL0: H.4 R1.1 WROVER1.36 | length 28.7
  Top Layer w0.229: v2(48.26,68.072) 50.292,66.04 50.927,66.04 51.473,66.586 55.062,66.586 55.963,65.685 55.963,65.612 56.476,65.099 WROVER1.36
  Top Layer w0.381: WROVER1.36 56.744,64.572 56.744,63.333 56.784,63.373 R1.1@56.784,63.068
  Bottom Layer w0.229: H.4 36.449,68.072 v2(48.26,68.072)
SCL1: OLED1.3 R4.1 WROVER1.8 | length 12.5
  Top Layer w0.229: R4.1 42.295,84.908 49.119,84.908 OLED1.3@50.126,85.915 ; WROVER1.8@50.368,82.37 v2(50.368,83.541)
  Bottom Layer w0.229: OLED1.3 49.787,84.122 v2(50.368,83.541)
SDA0: H.5 R3.1 WROVER1.33 | length 23
  Top Layer w0.203: H.5 v2(38.989,67.31) ; v2(52.578,66.04) 52.578,65.958 52.666,65.869 WROVER1.33
  Top Layer w0.229: R3.1@52.39,63.069 52.39,64.116 WROVER1.33@52.392,64.117 ; WROVER1.33@52.392,64.305 52.666,64.579 WROVER1.33
  Bottom Layer w0.203: v2(38.989,67.31) 39.072,67.393 51.225,67.393 v2(52.578,66.04)
SDA1: OLED1.4 R2.1 WROVER1.37 | length 36.7
  Top Layer w0.229: R2.1 40.182,85.166 40.846,84.502 49.831,84.502 51.279,85.95 OLED1.4 ; v2(52.934,81.128) 56.134,77.927 56.134,68.682 57.556,67.259 57.556,65.029 WROVER1.37
  Bottom Layer w0.229: OLED1.4@52.157,85.779 52.56,85.376 52.327,85.376 52.327,81.76 52.934,81.153 v2(52.934,81.128)
TX0: CP.25 WROVER1.35 | length 4.3
  Top Layer w0.203: CP.25@54.237,60.935 54.237,63.321 54.843,63.927 54.843,64.476 WROVER1.35
VBUS: C19.1 C20.1 CP.7 CP.8 D1.1 USB1.1 | length 24.7
  Top Layer w0.203: C20.1@50.229,56.356 50.971,56.356 51.613,56.998 CP.7@51.919,56.998 ; CP.7@51.812,57.01 52.134,57.01 52.735,56.408 52.737,56.406 CP.8@52.737,56.085
  Top Layer w0.381: D1.1 38.1,45.652 38.26,45.492 38.802,45.492 v1(39.341,44.954) 39.853,44.442 USB1.1 ; v1(48.311,57.175) 48.311,56.979 C19.1 ; C19.1@48.832,56.356 C20.1@50.229,56.356
  Bottom Layer w0.381: v1(39.341,44.954) 46.406,52.019 46.406,55.27 v1(48.311,57.175)
pads on no net: CP.1 CP.2 CP.9 CP.10 CP.11 CP.12 CP.13 CP.14 CP.15 CP.16 CP.17 CP.18 CP.19 CP.20 CP.21 CP.22 CP.23 CP.27 LD.4 SD1.13 SD1.14 SW1.3 SW1.4 SW2.3 SW2.4 SW3.3 SW3.4 SW4.3 SW4.4 USB1.4 USB1.10 USB1.11 WROVER1.17 WROVER1.18 WROVER1.19 WROVER1.20 WROVER1.21 WROVER1.22 WROVER1.27 WROVER1.28 WROVER1.32
copper on no net:
  other v1: 48.031,42.723 46.685,43.51 48.031,44.526 56.439,49.86 47.32,51.308
  other v4: 32.995,42.799 63.881,42.799 32.995,87.376 63.881,87.376
  other v5: 36.881,61.889 59.995,61.889 59.995,85.522 36.881,85.537
  other v6: 59.969,88.087

## Polygon pours and split planes (outlines as drawn)
GND on Top Layer "TOP_GND" (solid, pour order 0): 67.31,64.643 59.944,64.643 59.944,82.677 67.31,82.677 67.31,88.011 64.897,90.424 31.75,90.424 29.464,88.138 29.464,42.037 32.004,39.497 64.897,39.497 67.31,41.91
GND on Bottom Layer "BOT_GND" (solid, pour order 2): 67.31,82.677 59.944,82.677 59.944,64.643 67.31,64.643 67.31,41.91 64.897,39.497 32.004,39.497 29.464,42.037 29.464,88.138 31.75,90.424 64.897,90.424 67.31,88.011

## Silkscreen, mask and mechanical layers (free items; w line width, h text height)
Top Overlay:
  text "34" at 29.972,82.042 h1.52
  text "25" at 29.971,79.502 h1.52
  text "c" at 41.504,78.283 h15.24
  text "23" at 29.971,76.962 h1.52
  text "19" at 29.972,74.422 h1.52
  text "18" at 29.972,71.882 h1.52
  text "0" at 30.226,69.342 h1.52
  text "SD" at 29.972,66.802 h1.52
  text "SC" at 29.972,64.262 h1.52
  text "3.3" at 29.972,61.722 h1.52
  text "5V" at 29.972,59.182 h1.52
  text "GN" at 29.972,56.642 h1.52
Bottom Overlay:
  text "SD" at 66.604,82.931 h3.05 r90
  text "v2" at 66.637,79.375 h3.05 r90
  text "a" at 60.249,41.478 h15.24
Top Solder:
  text "b" at 56.998,86.03 h5.08
Mechanical 13:
  circle w0.1: c52.637,60.11 r0.5
  lines w0.1: 51.737,56.01 56.737,56.01 56.737,61.01 51.737,61.01 51.737,56.01
Mechanical 15:
  lines w0.1: 53.737,58.51 54.737,58.51 ; 54.237,58.01 54.237,59.01
  lines w0.254: 29.591,42.164 ccw(c32.131,42.164) 32.131,39.624 64.643,39.624 ccw(c64.643,42.164) 67.183,42.164 67.183,87.376 67.183,87.757 ccw(c64.643,87.757) 64.643,90.297 32.131,90.297 ccw(c32.131,87.757) 29.591,87.757 29.591,42.291